# Altium PCB S52最小系统.PcbDoc (part 7 of 9)
Units mm, origin at the board's own origin, x right, y up, seen from the top; angles counter-clockwise.
Board outline 152.4 x 101.6 mm, 2 copper layers (Top Layer, Bottom Layer); 29 components, 53 nets, 176 pads, 2 vias.
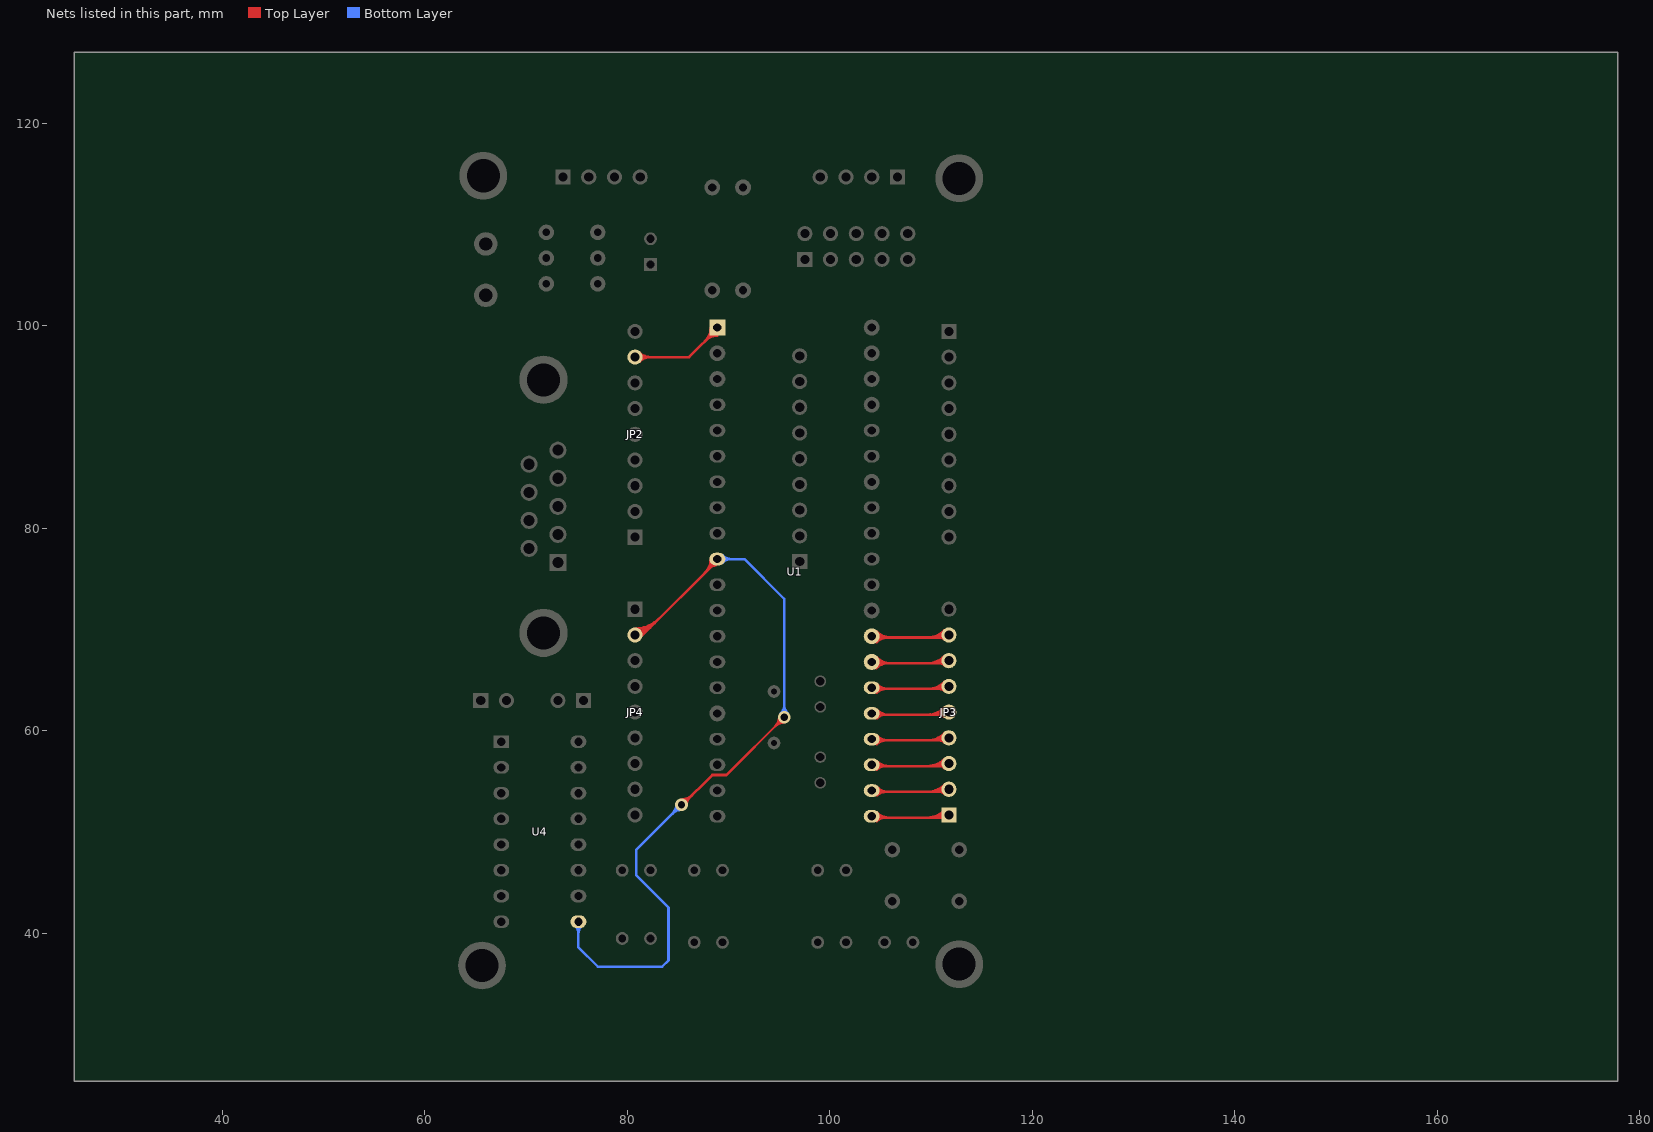
[diagram p7: the nets of this part, all layers, seen from the top]

## Via types
v1: diameter 1.27, hole 0.711, Top Layer to Bottom Layer, 2 vias

## Nets (pads, with @x,y where several pads share a name; then routed paths per layer and width w, separated by ;. In a path a pad name is that pad's centre, name@x,y a point inside that pad or via, vN(x,y) a via of type N, cw(c..) or ccw(c..) an arc to the next point about the centre after c; other vN are vias at no path point) (continued)
NetJP2_8: JP2.8 U1.1 | length 85.2
  Top Layer w0.254: JP2.8@80.772,96.901 86.103,96.901 U1.1@88.896,99.694 ; JP2.8@81.033,96.64 cw(c81.663,96.01) 81.663,96.901 ; JP2.8@81.033,96.64 cw(c81.663,96.01) 81.663,96.901 ; JP2.8@81.033,96.64 cw(c81.663,96.01) 81.663,96.901 ; JP2.8@81.033,96.64 cw(c81.663,96.01) 81.663,96.901 ; JP2.8@81.033,96.64 cw(c81.663,96.01) 81.663,96.901 ; JP2.8@81.033,96.64 cw(c81.663,96.01) 81.663,96.901 ; JP2.8@81.033,96.64 cw(c81.663,96.01) 81.663,96.901 ; JP2.8@81.033,96.64 cw(c81.663,96.01) 81.663,96.901 ; JP2.8@81.033,96.64 cw(c81.663,96.01) 81.663,96.901 ; JP2.8@81.033,96.64 cw(c81.663,96.01) 81.663,96.901 ; JP2.8@81.033,97.162 ccw(c81.663,97.792) 81.663,96.901 ; JP2.8@81.033,97.162 ccw(c81.663,97.792) 81.663,96.901 ; JP2.8@81.033,97.162 ccw(c81.663,97.792) 81.663,96.901 ; JP2.8@81.033,97.162 ccw(c81.663,97.792) 81.663,96.901 ; JP2.8@81.033,97.162 ccw(c81.663,97.792) 81.663,96.901 ; JP2.8@81.033,97.162 ccw(c81.663,97.792) 81.663,96.901 ; JP2.8@81.033,97.162 ccw(c81.663,97.792) 81.663,96.901 ; JP2.8@81.033,97.162 ccw(c81.663,97.792) 81.663,96.901 ; JP2.8@81.033,97.162 ccw(c81.663,97.792) 81.663,96.901 ; JP2.8@81.033,97.162 ccw(c81.663,97.792) 81.663,96.901 ; JP2.8@81.213,96.46 cw(c82.276,95.397) 82.276,96.901 ; JP2.8@81.213,96.46 cw(c82.276,95.397) 82.276,96.901 ; JP2.8@81.213,96.46 cw(c82.276,95.397) 82.276,96.901 ; JP2.8@81.213,96.46 cw(c82.276,95.397) 82.276,96.901 ; JP2.8@81.213,96.46 cw(c82.276,95.397) 82.276,96.901 ; JP2.8@81.213,96.46 cw(c82.276,95.397) 82.276,96.901 ; JP2.8@81.213,96.46 cw(c82.276,95.397) 82.276,96.901 ; JP2.8@81.213,96.46 cw(c82.276,95.397) 82.276,96.901 ; JP2.8@81.213,96.46 cw(c82.276,95.397) 82.276,96.901 ; JP2.8@81.213,96.46 cw(c82.276,95.397) 82.276,96.901 ; JP2.8@81.213,97.342 ccw(c82.276,98.405) 82.276,96.901 ; JP2.8@81.213,97.342 ccw(c82.276,98.405) 82.276,96.901 ; JP2.8@81.213,97.342 ccw(c82.276,98.405) 82.276,96.901 ; JP2.8@81.213,97.342 ccw(c82.276,98.405) 82.276,96.901 ; JP2.8@81.213,97.342 ccw(c82.276,98.405) 82.276,96.901 ; JP2.8@81.213,97.342 ccw(c82.276,98.405) 82.276,96.901 ; JP2.8@81.213,97.342 ccw(c82.276,98.405) 82.276,96.901 ; JP2.8@81.213,97.342 ccw(c82.276,98.405) 82.276,96.901 ; JP2.8@81.213,97.342 ccw(c82.276,98.405) 82.276,96.901 ; JP2.8@81.213,97.342 ccw(c82.276,98.405) 82.276,96.901 ; 87.679,98.477 ccw(c86.335,99.821) U1.1@88.236,99.821 ; 87.679,98.477 ccw(c86.335,99.821) U1.1@88.236,99.821 ; 87.679,98.477 ccw(c86.335,99.821) U1.1@88.236,99.821 ; 87.679,98.477 ccw(c86.335,99.821) U1.1@88.236,99.821 ; 87.769,98.567 cw(c88.896,97.439) U1.1@88.896,99.034 ; 87.769,98.567 ccw(c86.641,99.694) U1.1@88.236,99.694 ; 87.769,98.567 ccw(c86.641,99.694) U1.1@88.236,99.694 ; 87.769,98.567 cw(c88.896,97.439) U1.1@88.896,99.034 ; 87.769,98.567 ccw(c86.641,99.694) U1.1@88.236,99.694 ; 87.769,98.567 cw(c88.896,97.439) U1.1@88.896,99.034 ; 87.769,98.567 ccw(c86.641,99.694) U1.1@88.236,99.694 ; 87.769,98.567 cw(c88.896,97.439) U1.1@88.896,99.034 ; 87.769,98.567 ccw(c86.641,99.694) U1.1@88.236,99.694 ; 87.769,98.567 cw(c88.896,97.439) U1.1@88.896,99.034 ; 87.769,98.567 ccw(c86.641,99.694) U1.1@88.236,99.694 ; 87.769,98.567 cw(c88.896,97.439) U1.1@88.896,99.034 ; 87.986,98.783 cw(c88.896,97.873) U1.1@88.896,99.161 ; 87.986,98.783 cw(c88.896,97.873) U1.1@88.896,99.161 ; 87.986,98.783 cw(c88.896,97.873) U1.1@88.896,99.161 ; 87.986,98.783 cw(c88.896,97.873) U1.1@88.896,99.161 ; 88.113,98.91 ccw(c87.202,99.821) U1.1@88.49,99.821 ; 88.113,98.91 ccw(c87.202,99.821) U1.1@88.49,99.821 ; 88.113,98.91 ccw(c87.202,99.821) U1.1@88.49,99.821 ; 88.113,98.91 ccw(c87.202,99.821) U1.1@88.49,99.821 ; 88.202,99 cw(c88.896,98.306) U1.1@88.896,99.288 ; 88.202,99 ccw(c87.509,99.694) U1.1@88.49,99.694 ; 88.202,99 ccw(c87.509,99.694) U1.1@88.49,99.694 ; 88.202,99 cw(c88.896,98.306) U1.1@88.896,99.288 ; 88.202,99 ccw(c87.509,99.694) U1.1@88.49,99.694 ; 88.202,99 cw(c88.896,98.306) U1.1@88.896,99.288 ; 88.202,99 ccw(c87.509,99.694) U1.1@88.49,99.694 ; 88.202,99 cw(c88.896,98.306) U1.1@88.896,99.288 ; 88.202,99 ccw(c87.509,99.694) U1.1@88.49,99.694 ; 88.202,99 cw(c88.896,98.306) U1.1@88.896,99.288 ; 88.202,99 ccw(c87.509,99.694) U1.1@88.49,99.694 ; 88.202,99 cw(c88.896,98.306) U1.1@88.896,99.288
NetJP3_1: JP3.1 U1.21 | length 76.3
  Top Layer w0.254: U1.21@104.136,51.434 111.505,51.434 JP3.1@111.76,51.689 ; U1.21@104.471,51.734 ccw(c105.194,52.457) 105.194,51.434 ; U1.21@104.471,51.734 ccw(c105.194,52.457) 105.194,51.434 ; U1.21@104.471,51.734 ccw(c105.194,52.457) 105.194,51.434 ; U1.21@104.471,51.734 ccw(c105.194,52.457) 105.194,51.434 ; U1.21@104.651,51.082 cw(c105.501,50.232) 105.501,51.434 ; U1.21@104.651,51.082 cw(c105.501,50.232) 105.501,51.434 ; U1.21@104.651,51.082 cw(c105.501,50.232) 105.501,51.434 ; U1.21@104.651,51.082 cw(c105.501,50.232) 105.501,51.434 ; U1.21@104.651,51.082 cw(c105.501,50.232) 105.501,51.434 ; U1.21@104.651,51.082 cw(c105.501,50.232) 105.501,51.434 ; U1.21@104.651,51.209 cw(c105.194,50.665) 105.194,51.434 ; U1.21@104.651,51.209 cw(c105.194,50.665) 105.194,51.434 ; U1.21@104.651,51.209 cw(c105.194,50.665) 105.194,51.434 ; U1.21@104.651,51.209 cw(c105.194,50.665) 105.194,51.434 ; U1.21@104.651,51.786 ccw(c105.501,52.636) 105.501,51.434 ; U1.21@104.651,51.786 ccw(c105.501,52.636) 105.501,51.434 ; U1.21@104.651,51.786 ccw(c105.501,52.636) 105.501,51.434 ; U1.21@104.651,51.786 ccw(c105.501,52.636) 105.501,51.434 ; U1.21@104.651,51.786 ccw(c105.501,52.636) 105.501,51.434 ; U1.21@104.651,51.786 ccw(c105.501,52.636) 105.501,51.434 ; U1.21@104.651,51.913 ccw(c105.807,53.07) 105.807,51.434 ; U1.21@104.651,51.913 ccw(c105.807,53.07) 105.807,51.434 ; U1.21@104.651,51.913 ccw(c105.807,53.07) 105.807,51.434 ; U1.21@104.651,51.913 ccw(c105.807,53.07) 105.807,51.434 ; 109.64,51.434 ccw(c109.64,53.809) JP3.1@111.319,52.13 ; 109.64,51.434 ccw(c109.64,53.809) JP3.1@111.319,52.13 ; 109.64,51.434 ccw(c109.64,53.809) JP3.1@111.319,52.13 ; 109.64,51.434 ccw(c109.64,53.809) JP3.1@111.319,52.13 ; 109.64,51.434 ccw(c109.64,53.809) JP3.1@111.319,52.13 ; 109.64,51.434 ccw(c109.64,53.809) JP3.1@111.319,52.13 ; 109.64,51.434 ccw(c109.64,53.809) JP3.1@111.319,52.13 ; 109.64,51.434 ccw(c109.64,53.809) JP3.1@111.319,52.13 ; 109.64,51.434 ccw(c109.64,53.809) JP3.1@111.319,52.13 ; 109.64,51.434 ccw(c109.64,53.809) JP3.1@111.319,52.13 ; 110.254,51.434 ccw(c110.254,53.195) JP3.1@111.499,51.95 ; 110.254,51.434 ccw(c110.254,53.195) JP3.1@111.499,51.95 ; 110.254,51.434 ccw(c110.254,53.195) JP3.1@111.499,51.95 ; 110.254,51.434 ccw(c110.254,53.195) JP3.1@111.499,51.95 ; 110.254,51.434 ccw(c110.254,53.195) JP3.1@111.499,51.95 ; 110.254,51.434 ccw(c110.254,53.195) JP3.1@111.499,51.95 ; 110.254,51.434 ccw(c110.254,53.195) JP3.1@111.499,51.95 ; 110.254,51.434 ccw(c110.254,53.195) JP3.1@111.499,51.95 ; 110.254,51.434 ccw(c110.254,53.195) JP3.1@111.499,51.95 ; 110.254,51.434 ccw(c110.254,53.195) JP3.1@111.499,51.95 ; 110.867,51.434 ccw(c110.867,52.582) JP3.1@111.679,51.77 ; 110.867,51.434 ccw(c110.867,52.582) JP3.1@111.679,51.77 ; 110.867,51.434 ccw(c110.867,52.582) JP3.1@111.679,51.77 ; 110.867,51.434 ccw(c110.867,52.582) JP3.1@111.679,51.77 ; 110.867,51.434 ccw(c110.867,52.582) JP3.1@111.679,51.77 ; 110.867,51.434 ccw(c110.867,52.582) JP3.1@111.679,51.77 ; 110.867,51.434 ccw(c110.867,52.582) JP3.1@111.679,51.77 ; 110.867,51.434 ccw(c110.867,52.582) JP3.1@111.679,51.77 ; 110.867,51.434 ccw(c110.867,52.582) JP3.1@111.679,51.77 ; 110.867,51.434 ccw(c110.867,52.582) JP3.1@111.679,51.77 ; 110.872,51.434 cw(c110.872,50.801) JP3.1@111.319,51.248 ; 110.872,51.434 cw(c110.872,50.801) JP3.1@111.319,51.248 ; 110.872,51.434 cw(c110.872,50.801) JP3.1@111.319,51.248 ; 110.872,51.434 cw(c110.872,50.801) JP3.1@111.319,51.248 ; 110.872,51.434 cw(c110.872,50.801) JP3.1@111.319,51.248 ; 110.872,51.434 cw(c110.872,50.801) JP3.1@111.319,51.248 ; 110.872,51.434 cw(c110.872,50.801) JP3.1@111.319,51.248 ; 110.872,51.434 cw(c110.872,50.801) JP3.1@111.319,51.248 ; 110.872,51.434 cw(c110.872,50.801) JP3.1@111.319,51.248 ; 110.872,51.434 cw(c110.872,50.801) JP3.1@111.319,51.248
NetJP3_2: JP3.2 U1.22 | length 76.3
  Top Layer w0.254: U1.22@104.136,53.974 111.505,53.974 JP3.2@111.76,54.229 ; U1.22@104.471,54.274 ccw(c105.194,54.997) 105.194,53.974 ; U1.22@104.471,54.274 ccw(c105.194,54.997) 105.194,53.974 ; U1.22@104.471,54.274 ccw(c105.194,54.997) 105.194,53.974 ; U1.22@104.471,54.274 ccw(c105.194,54.997) 105.194,53.974 ; U1.22@104.651,53.622 cw(c105.501,52.772) 105.501,53.974 ; U1.22@104.651,53.622 cw(c105.501,52.772) 105.501,53.974 ; U1.22@104.651,53.622 cw(c105.501,52.772) 105.501,53.974 ; U1.22@104.651,53.622 cw(c105.501,52.772) 105.501,53.974 ; U1.22@104.651,53.622 cw(c105.501,52.772) 105.501,53.974 ; U1.22@104.651,53.622 cw(c105.501,52.772) 105.501,53.974 ; U1.22@104.651,53.749 cw(c105.194,53.205) 105.194,53.974 ; U1.22@104.651,53.749 cw(c105.194,53.205) 105.194,53.974 ; U1.22@104.651,53.749 cw(c105.194,53.205) 105.194,53.974 ; U1.22@104.651,53.749 cw(c105.194,53.205) 105.194,53.974 ; U1.22@104.651,54.326 ccw(c105.501,55.176) 105.501,53.974 ; U1.22@104.651,54.326 ccw(c105.501,55.176) 105.501,53.974 ; U1.22@104.651,54.326 ccw(c105.501,55.176) 105.501,53.974 ; U1.22@104.651,54.326 ccw(c105.501,55.176) 105.501,53.974 ; U1.22@104.651,54.326 ccw(c105.501,55.176) 105.501,53.974 ; U1.22@104.651,54.326 ccw(c105.501,55.176) 105.501,53.974 ; U1.22@104.651,54.453 ccw(c105.807,55.61) 105.807,53.974 ; U1.22@104.651,54.453 ccw(c105.807,55.61) 105.807,53.974 ; U1.22@104.651,54.453 ccw(c105.807,55.61) 105.807,53.974 ; U1.22@104.651,54.453 ccw(c105.807,55.61) 105.807,53.974 ; 109.64,53.974 ccw(c109.64,56.349) JP3.2@111.319,54.67 ; 109.64,53.974 ccw(c109.64,56.349) JP3.2@111.319,54.67 ; 109.64,53.974 ccw(c109.64,56.349) JP3.2@111.319,54.67 ; 109.64,53.974 ccw(c109.64,56.349) JP3.2@111.319,54.67 ; 109.64,53.974 ccw(c109.64,56.349) JP3.2@111.319,54.67 ; 109.64,53.974 ccw(c109.64,56.349) JP3.2@111.319,54.67 ; 109.64,53.974 ccw(c109.64,56.349) JP3.2@111.319,54.67 ; 109.64,53.974 ccw(c109.64,56.349) JP3.2@111.319,54.67 ; 109.64,53.974 ccw(c109.64,56.349) JP3.2@111.319,54.67 ; 109.64,53.974 ccw(c109.64,56.349) JP3.2@111.319,54.67 ; 110.254,53.974 ccw(c110.254,55.735) JP3.2@111.499,54.49 ; 110.254,53.974 ccw(c110.254,55.735) JP3.2@111.499,54.49 ; 110.254,53.974 ccw(c110.254,55.735) JP3.2@111.499,54.49 ; 110.254,53.974 ccw(c110.254,55.735) JP3.2@111.499,54.49 ; 110.254,53.974 ccw(c110.254,55.735) JP3.2@111.499,54.49 ; 110.254,53.974 ccw(c110.254,55.735) JP3.2@111.499,54.49 ; 110.254,53.974 ccw(c110.254,55.735) JP3.2@111.499,54.49 ; 110.254,53.974 ccw(c110.254,55.735) JP3.2@111.499,54.49 ; 110.254,53.974 ccw(c110.254,55.735) JP3.2@111.499,54.49 ; 110.254,53.974 ccw(c110.254,55.735) JP3.2@111.499,54.49 ; 110.867,53.974 ccw(c110.867,55.122) JP3.2@111.679,54.31 ; 110.867,53.974 ccw(c110.867,55.122) JP3.2@111.679,54.31 ; 110.867,53.974 ccw(c110.867,55.122) JP3.2@111.679,54.31 ; 110.867,53.974 ccw(c110.867,55.122) JP3.2@111.679,54.31 ; 110.867,53.974 ccw(c110.867,55.122) JP3.2@111.679,54.31 ; 110.867,53.974 ccw(c110.867,55.122) JP3.2@111.679,54.31 ; 110.867,53.974 ccw(c110.867,55.122) JP3.2@111.679,54.31 ; 110.867,53.974 ccw(c110.867,55.122) JP3.2@111.679,54.31 ; 110.867,53.974 ccw(c110.867,55.122) JP3.2@111.679,54.31 ; 110.867,53.974 ccw(c110.867,55.122) JP3.2@111.679,54.31 ; 110.872,53.974 cw(c110.872,53.341) JP3.2@111.319,53.788 ; 110.872,53.974 cw(c110.872,53.341) JP3.2@111.319,53.788 ; 110.872,53.974 cw(c110.872,53.341) JP3.2@111.319,53.788 ; 110.872,53.974 cw(c110.872,53.341) JP3.2@111.319,53.788 ; 110.872,53.974 cw(c110.872,53.341) JP3.2@111.319,53.788 ; 110.872,53.974 cw(c110.872,53.341) JP3.2@111.319,53.788 ; 110.872,53.974 cw(c110.872,53.341) JP3.2@111.319,53.788 ; 110.872,53.974 cw(c110.872,53.341) JP3.2@111.319,53.788 ; 110.872,53.974 cw(c110.872,53.341) JP3.2@111.319,53.788 ; 110.872,53.974 cw(c110.872,53.341) JP3.2@111.319,53.788
NetJP3_3: JP3.3 U1.23 | length 76.3
  Top Layer w0.254: U1.23@104.136,56.514 111.505,56.514 JP3.3@111.76,56.769 ; U1.23@104.471,56.814 ccw(c105.194,57.537) 105.194,56.514 ; U1.23@104.471,56.814 ccw(c105.194,57.537) 105.194,56.514 ; U1.23@104.471,56.814 ccw(c105.194,57.537) 105.194,56.514 ; U1.23@104.471,56.814 ccw(c105.194,57.537) 105.194,56.514 ; U1.23@104.651,56.162 cw(c105.501,55.312) 105.501,56.514 ; U1.23@104.651,56.162 cw(c105.501,55.312) 105.501,56.514 ; U1.23@104.651,56.162 cw(c105.501,55.312) 105.501,56.514 ; U1.23@104.651,56.162 cw(c105.501,55.312) 105.501,56.514 ; U1.23@104.651,56.162 cw(c105.501,55.312) 105.501,56.514 ; U1.23@104.651,56.162 cw(c105.501,55.312) 105.501,56.514 ; U1.23@104.651,56.289 cw(c105.194,55.745) 105.194,56.514 ; U1.23@104.651,56.289 cw(c105.194,55.745) 105.194,56.514 ; U1.23@104.651,56.289 cw(c105.194,55.745) 105.194,56.514 ; U1.23@104.651,56.289 cw(c105.194,55.745) 105.194,56.514 ; U1.23@104.651,56.866 ccw(c105.501,57.716) 105.501,56.514 ; U1.23@104.651,56.866 ccw(c105.501,57.716) 105.501,56.514 ; U1.23@104.651,56.866 ccw(c105.501,57.716) 105.501,56.514 ; U1.23@104.651,56.866 ccw(c105.501,57.716) 105.501,56.514 ; U1.23@104.651,56.866 ccw(c105.501,57.716) 105.501,56.514 ; U1.23@104.651,56.866 ccw(c105.501,57.716) 105.501,56.514 ; U1.23@104.651,56.993 ccw(c105.807,58.15) 105.807,56.514 ; U1.23@104.651,56.993 ccw(c105.807,58.15) 105.807,56.514 ; U1.23@104.651,56.993 ccw(c105.807,58.15) 105.807,56.514 ; U1.23@104.651,56.993 ccw(c105.807,58.15) 105.807,56.514 ; 109.64,56.514 ccw(c109.64,58.889) JP3.3@111.319,57.21 ; 109.64,56.514 ccw(c109.64,58.889) JP3.3@111.319,57.21 ; 109.64,56.514 ccw(c109.64,58.889) JP3.3@111.319,57.21 ; 109.64,56.514 ccw(c109.64,58.889) JP3.3@111.319,57.21 ; 109.64,56.514 ccw(c109.64,58.889) JP3.3@111.319,57.21 ; 109.64,56.514 ccw(c109.64,58.889) JP3.3@111.319,57.21 ; 109.64,56.514 ccw(c109.64,58.889) JP3.3@111.319,57.21 ; 109.64,56.514 ccw(c109.64,58.889) JP3.3@111.319,57.21 ; 109.64,56.514 ccw(c109.64,58.889) JP3.3@111.319,57.21 ; 109.64,56.514 ccw(c109.64,58.889) JP3.3@111.319,57.21 ; 110.254,56.514 ccw(c110.254,58.275) JP3.3@111.499,57.03 ; 110.254,56.514 ccw(c110.254,58.275) JP3.3@111.499,57.03 ; 110.254,56.514 ccw(c110.254,58.275) JP3.3@111.499,57.03 ; 110.254,56.514 ccw(c110.254,58.275) JP3.3@111.499,57.03 ; 110.254,56.514 ccw(c110.254,58.275) JP3.3@111.499,57.03 ; 110.254,56.514 ccw(c110.254,58.275) JP3.3@111.499,57.03 ; 110.254,56.514 ccw(c110.254,58.275) JP3.3@111.499,57.03 ; 110.254,56.514 ccw(c110.254,58.275) JP3.3@111.499,57.03 ; 110.254,56.514 ccw(c110.254,58.275) JP3.3@111.499,57.03 ; 110.254,56.514 ccw(c110.254,58.275) JP3.3@111.499,57.03 ; 110.867,56.514 ccw(c110.867,57.662) JP3.3@111.679,56.85 ; 110.867,56.514 ccw(c110.867,57.662) JP3.3@111.679,56.85 ; 110.867,56.514 ccw(c110.867,57.662) JP3.3@111.679,56.85 ; 110.867,56.514 ccw(c110.867,57.662) JP3.3@111.679,56.85 ; 110.867,56.514 ccw(c110.867,57.662) JP3.3@111.679,56.85 ; 110.867,56.514 ccw(c110.867,57.662) JP3.3@111.679,56.85 ; 110.867,56.514 ccw(c110.867,57.662) JP3.3@111.679,56.85 ; 110.867,56.514 ccw(c110.867,57.662) JP3.3@111.679,56.85 ; 110.867,56.514 ccw(c110.867,57.662) JP3.3@111.679,56.85 ; 110.867,56.514 ccw(c110.867,57.662) JP3.3@111.679,56.85 ; 110.872,56.514 cw(c110.872,55.881) JP3.3@111.319,56.328 ; 110.872,56.514 cw(c110.872,55.881) JP3.3@111.319,56.328 ; 110.872,56.514 cw(c110.872,55.881) JP3.3@111.319,56.328 ; 110.872,56.514 cw(c110.872,55.881) JP3.3@111.319,56.328 ; 110.872,56.514 cw(c110.872,55.881) JP3.3@111.319,56.328 ; 110.872,56.514 cw(c110.872,55.881) JP3.3@111.319,56.328 ; 110.872,56.514 cw(c110.872,55.881) JP3.3@111.319,56.328 ; 110.872,56.514 cw(c110.872,55.881) JP3.3@111.319,56.328 ; 110.872,56.514 cw(c110.872,55.881) JP3.3@111.319,56.328 ; 110.872,56.514 cw(c110.872,55.881) JP3.3@111.319,56.328
NetJP3_4: JP3.4 U1.24 | length 76.3
  Top Layer w0.254: U1.24@104.136,59.054 111.505,59.054 JP3.4@111.76,59.309 ; U1.24@104.471,59.354 ccw(c105.194,60.077) 105.194,59.054 ; U1.24@104.471,59.354 ccw(c105.194,60.077) 105.194,59.054 ; U1.24@104.471,59.354 ccw(c105.194,60.077) 105.194,59.054 ; U1.24@104.471,59.354 ccw(c105.194,60.077) 105.194,59.054 ; U1.24@104.651,58.702 cw(c105.501,57.852) 105.501,59.054 ; U1.24@104.651,58.702 cw(c105.501,57.852) 105.501,59.054 ; U1.24@104.651,58.702 cw(c105.501,57.852) 105.501,59.054 ; U1.24@104.651,58.702 cw(c105.501,57.852) 105.501,59.054 ; U1.24@104.651,58.702 cw(c105.501,57.852) 105.501,59.054 ; U1.24@104.651,58.702 cw(c105.501,57.852) 105.501,59.054 ; U1.24@104.651,58.829 cw(c105.194,58.285) 105.194,59.054 ; U1.24@104.651,58.829 cw(c105.194,58.285) 105.194,59.054 ; U1.24@104.651,58.829 cw(c105.194,58.285) 105.194,59.054 ; U1.24@104.651,58.829 cw(c105.194,58.285) 105.194,59.054 ; U1.24@104.651,59.406 ccw(c105.501,60.256) 105.501,59.054 ; U1.24@104.651,59.406 ccw(c105.501,60.256) 105.501,59.054 ; U1.24@104.651,59.406 ccw(c105.501,60.256) 105.501,59.054 ; U1.24@104.651,59.406 ccw(c105.501,60.256) 105.501,59.054 ; U1.24@104.651,59.406 ccw(c105.501,60.256) 105.501,59.054 ; U1.24@104.651,59.406 ccw(c105.501,60.256) 105.501,59.054 ; U1.24@104.651,59.533 ccw(c105.807,60.69) 105.807,59.054 ; U1.24@104.651,59.533 ccw(c105.807,60.69) 105.807,59.054 ; U1.24@104.651,59.533 ccw(c105.807,60.69) 105.807,59.054 ; U1.24@104.651,59.533 ccw(c105.807,60.69) 105.807,59.054 ; 109.64,59.054 ccw(c109.64,61.429) JP3.4@111.319,59.75 ; 109.64,59.054 ccw(c109.64,61.429) JP3.4@111.319,59.75 ; 109.64,59.054 ccw(c109.64,61.429) JP3.4@111.319,59.75 ; 109.64,59.054 ccw(c109.64,61.429) JP3.4@111.319,59.75 ; 109.64,59.054 ccw(c109.64,61.429) JP3.4@111.319,59.75 ; 109.64,59.054 ccw(c109.64,61.429) JP3.4@111.319,59.75 ; 109.64,59.054 ccw(c109.64,61.429) JP3.4@111.319,59.75 ; 109.64,59.054 ccw(c109.64,61.429) JP3.4@111.319,59.75 ; 109.64,59.054 ccw(c109.64,61.429) JP3.4@111.319,59.75 ; 109.64,59.054 ccw(c109.64,61.429) JP3.4@111.319,59.75 ; 110.254,59.054 ccw(c110.254,60.815) JP3.4@111.499,59.57 ; 110.254,59.054 ccw(c110.254,60.815) JP3.4@111.499,59.57 ; 110.254,59.054 ccw(c110.254,60.815) JP3.4@111.499,59.57 ; 110.254,59.054 ccw(c110.254,60.815) JP3.4@111.499,59.57 ; 110.254,59.054 ccw(c110.254,60.815) JP3.4@111.499,59.57 ; 110.254,59.054 ccw(c110.254,60.815) JP3.4@111.499,59.57 ; 110.254,59.054 ccw(c110.254,60.815) JP3.4@111.499,59.57 ; 110.254,59.054 ccw(c110.254,60.815) JP3.4@111.499,59.57 ; 110.254,59.054 ccw(c110.254,60.815) JP3.4@111.499,59.57 ; 110.254,59.054 ccw(c110.254,60.815) JP3.4@111.499,59.57 ; 110.867,59.054 ccw(c110.867,60.202) JP3.4@111.679,59.39 ; 110.867,59.054 ccw(c110.867,60.202) JP3.4@111.679,59.39 ; 110.867,59.054 ccw(c110.867,60.202) JP3.4@111.679,59.39 ; 110.867,59.054 ccw(c110.867,60.202) JP3.4@111.679,59.39 ; 110.867,59.054 ccw(c110.867,60.202) JP3.4@111.679,59.39 ; 110.867,59.054 ccw(c110.867,60.202) JP3.4@111.679,59.39 ; 110.867,59.054 ccw(c110.867,60.202) JP3.4@111.679,59.39 ; 110.867,59.054 ccw(c110.867,60.202) JP3.4@111.679,59.39 ; 110.867,59.054 ccw(c110.867,60.202) JP3.4@111.679,59.39 ; 110.867,59.054 ccw(c110.867,60.202) JP3.4@111.679,59.39 ; 110.872,59.054 cw(c110.872,58.421) JP3.4@111.319,58.868 ; 110.872,59.054 cw(c110.872,58.421) JP3.4@111.319,58.868 ; 110.872,59.054 cw(c110.872,58.421) JP3.4@111.319,58.868 ; 110.872,59.054 cw(c110.872,58.421) JP3.4@111.319,58.868 ; 110.872,59.054 cw(c110.872,58.421) JP3.4@111.319,58.868 ; 110.872,59.054 cw(c110.872,58.421) JP3.4@111.319,58.868 ; 110.872,59.054 cw(c110.872,58.421) JP3.4@111.319,58.868 ; 110.872,59.054 cw(c110.872,58.421) JP3.4@111.319,58.868 ; 110.872,59.054 cw(c110.872,58.421) JP3.4@111.319,58.868 ; 110.872,59.054 cw(c110.872,58.421) JP3.4@111.319,58.868
NetJP3_5: JP3.5 U1.25 | length 76.3
  Top Layer w0.254: U1.25@104.136,61.594 111.505,61.594 JP3.5@111.76,61.849 ; U1.25@104.471,61.894 ccw(c105.194,62.617) 105.194,61.594 ; U1.25@104.471,61.894 ccw(c105.194,62.617) 105.194,61.594 ; U1.25@104.471,61.894 ccw(c105.194,62.617) 105.194,61.594 ; U1.25@104.471,61.894 ccw(c105.194,62.617) 105.194,61.594 ; U1.25@104.651,61.242 cw(c105.501,60.392) 105.501,61.594 ; U1.25@104.651,61.242 cw(c105.501,60.392) 105.501,61.594 ; U1.25@104.651,61.242 cw(c105.501,60.392) 105.501,61.594 ; U1.25@104.651,61.242 cw(c105.501,60.392) 105.501,61.594 ; U1.25@104.651,61.242 cw(c105.501,60.392) 105.501,61.594 ; U1.25@104.651,61.242 cw(c105.501,60.392) 105.501,61.594 ; U1.25@104.651,61.369 cw(c105.194,60.825) 105.194,61.594 ; U1.25@104.651,61.369 cw(c105.194,60.825) 105.194,61.594 ; U1.25@104.651,61.369 cw(c105.194,60.825) 105.194,61.594 ; U1.25@104.651,61.369 cw(c105.194,60.825) 105.194,61.594 ; U1.25@104.651,61.946 ccw(c105.501,62.796) 105.501,61.594 ; U1.25@104.651,61.946 ccw(c105.501,62.796) 105.501,61.594 ; U1.25@104.651,61.946 ccw(c105.501,62.796) 105.501,61.594 ; U1.25@104.651,61.946 ccw(c105.501,62.796) 105.501,61.594 ; U1.25@104.651,61.946 ccw(c105.501,62.796) 105.501,61.594 ; U1.25@104.651,61.946 ccw(c105.501,62.796) 105.501,61.594 ; U1.25@104.651,62.073 ccw(c105.807,63.23) 105.807,61.594 ; U1.25@104.651,62.073 ccw(c105.807,63.23) 105.807,61.594 ; U1.25@104.651,62.073 ccw(c105.807,63.23) 105.807,61.594 ; U1.25@104.651,62.073 ccw(c105.807,63.23) 105.807,61.594 ; 109.64,61.594 ccw(c109.64,63.969) JP3.5@111.319,62.29 ; 109.64,61.594 ccw(c109.64,63.969) JP3.5@111.319,62.29 ; 109.64,61.594 ccw(c109.64,63.969) JP3.5@111.319,62.29 ; 109.64,61.594 ccw(c109.64,63.969) JP3.5@111.319,62.29 ; 109.64,61.594 ccw(c109.64,63.969) JP3.5@111.319,62.29 ; 109.64,61.594 ccw(c109.64,63.969) JP3.5@111.319,62.29 ; 109.64,61.594 ccw(c109.64,63.969) JP3.5@111.319,62.29 ; 109.64,61.594 ccw(c109.64,63.969) JP3.5@111.319,62.29 ; 109.64,61.594 ccw(c109.64,63.969) JP3.5@111.319,62.29 ; 109.64,61.594 ccw(c109.64,63.969) JP3.5@111.319,62.29 ; 110.254,61.594 ccw(c110.254,63.355) JP3.5@111.499,62.11 ; 110.254,61.594 ccw(c110.254,63.355) JP3.5@111.499,62.11 ; 110.254,61.594 ccw(c110.254,63.355) JP3.5@111.499,62.11 ; 110.254,61.594 ccw(c110.254,63.355) JP3.5@111.499,62.11 ; 110.254,61.594 ccw(c110.254,63.355) JP3.5@111.499,62.11 ; 110.254,61.594 ccw(c110.254,63.355) JP3.5@111.499,62.11 ; 110.254,61.594 ccw(c110.254,63.355) JP3.5@111.499,62.11 ; 110.254,61.594 ccw(c110.254,63.355) JP3.5@111.499,62.11 ; 110.254,61.594 ccw(c110.254,63.355) JP3.5@111.499,62.11 ; 110.254,61.594 ccw(c110.254,63.355) JP3.5@111.499,62.11 ; 110.867,61.594 ccw(c110.867,62.742) JP3.5@111.679,61.93 ; 110.867,61.594 ccw(c110.867,62.742) JP3.5@111.679,61.93 ; 110.867,61.594 ccw(c110.867,62.742) JP3.5@111.679,61.93 ; 110.867,61.594 ccw(c110.867,62.742) JP3.5@111.679,61.93 ; 110.867,61.594 ccw(c110.867,62.742) JP3.5@111.679,61.93 ; 110.867,61.594 ccw(c110.867,62.742) JP3.5@111.679,61.93 ; 110.867,61.594 ccw(c110.867,62.742) JP3.5@111.679,61.93 ; 110.867,61.594 ccw(c110.867,62.742) JP3.5@111.679,61.93 ; 110.867,61.594 ccw(c110.867,62.742) JP3.5@111.679,61.93 ; 110.867,61.594 ccw(c110.867,62.742) JP3.5@111.679,61.93 ; 110.872,61.594 cw(c110.872,60.961) JP3.5@111.319,61.408 ; 110.872,61.594 cw(c110.872,60.961) JP3.5@111.319,61.408 ; 110.872,61.594 cw(c110.872,60.961) JP3.5@111.319,61.408 ; 110.872,61.594 cw(c110.872,60.961) JP3.5@111.319,61.408 ; 110.872,61.594 cw(c110.872,60.961) JP3.5@111.319,61.408 ; 110.872,61.594 cw(c110.872,60.961) JP3.5@111.319,61.408 ; 110.872,61.594 cw(c110.872,60.961) JP3.5@111.319,61.408 ; 110.872,61.594 cw(c110.872,60.961) JP3.5@111.319,61.408 ; 110.872,61.594 cw(c110.872,60.961) JP3.5@111.319,61.408 ; 110.872,61.594 cw(c110.872,60.961) JP3.5@111.319,61.408
NetJP3_6: JP3.6 U1.26 | length 76.3
  Top Layer w0.254: U1.26@104.136,64.134 111.505,64.134 JP3.6@111.76,64.389 ; U1.26@104.471,64.434 ccw(c105.194,65.157) 105.194,64.134 ; U1.26@104.471,64.434 ccw(c105.194,65.157) 105.194,64.134 ; U1.26@104.471,64.434 ccw(c105.194,65.157) 105.194,64.134 ; U1.26@104.471,64.434 ccw(c105.194,65.157) 105.194,64.134 ; U1.26@104.651,63.782 cw(c105.501,62.932) 105.501,64.134 ; U1.26@104.651,63.782 cw(c105.501,62.932) 105.501,64.134 ; U1.26@104.651,63.782 cw(c105.501,62.932) 105.501,64.134 ; U1.26@104.651,63.782 cw(c105.501,62.932) 105.501,64.134 ; U1.26@104.651,63.782 cw(c105.501,62.932) 105.501,64.134 ; U1.26@104.651,63.782 cw(c105.501,62.932) 105.501,64.134 ; U1.26@104.651,63.909 cw(c105.194,63.365) 105.194,64.134 ; U1.26@104.651,63.909 cw(c105.194,63.365) 105.194,64.134 ; U1.26@104.651,63.909 cw(c105.194,63.365) 105.194,64.134 ; U1.26@104.651,63.909 cw(c105.194,63.365) 105.194,64.134 ; U1.26@104.651,64.486 ccw(c105.501,65.336) 105.501,64.134 ; U1.26@104.651,64.486 ccw(c105.501,65.336) 105.501,64.134 ; U1.26@104.651,64.486 ccw(c105.501,65.336) 105.501,64.134 ; U1.26@104.651,64.486 ccw(c105.501,65.336) 105.501,64.134 ; U1.26@104.651,64.486 ccw(c105.501,65.336) 105.501,64.134 ; U1.26@104.651,64.486 ccw(c105.501,65.336) 105.501,64.134 ; U1.26@104.651,64.613 ccw(c105.807,65.77) 105.807,64.134 ; U1.26@104.651,64.613 ccw(c105.807,65.77) 105.807,64.134 ; U1.26@104.651,64.613 ccw(c105.807,65.77) 105.807,64.134 ; U1.26@104.651,64.613 ccw(c105.807,65.77) 105.807,64.134 ; 109.64,64.134 ccw(c109.64,66.509) JP3.6@111.319,64.83 ; 109.64,64.134 ccw(c109.64,66.509) JP3.6@111.319,64.83 ; 109.64,64.134 ccw(c109.64,66.509) JP3.6@111.319,64.83 ; 109.64,64.134 ccw(c109.64,66.509) JP3.6@111.319,64.83 ; 109.64,64.134 ccw(c109.64,66.509) JP3.6@111.319,64.83 ; 109.64,64.134 ccw(c109.64,66.509) JP3.6@111.319,64.83 ; 109.64,64.134 ccw(c109.64,66.509) JP3.6@111.319,64.83 ; 109.64,64.134 ccw(c109.64,66.509) JP3.6@111.319,64.83 ; 109.64,64.134 ccw(c109.64,66.509) JP3.6@111.319,64.83 ; 109.64,64.134 ccw(c109.64,66.509) JP3.6@111.319,64.83 ; 110.254,64.134 ccw(c110.254,65.895) JP3.6@111.499,64.65 ; 110.254,64.134 ccw(c110.254,65.895) JP3.6@111.499,64.65 ; 110.254,64.134 ccw(c110.254,65.895) JP3.6@111.499,64.65 ; 110.254,64.134 ccw(c110.254,65.895) JP3.6@111.499,64.65 ; 110.254,64.134 ccw(c110.254,65.895) JP3.6@111.499,64.65 ; 110.254,64.134 ccw(c110.254,65.895) JP3.6@111.499,64.65 ; 110.254,64.134 ccw(c110.254,65.895) JP3.6@111.499,64.65 ; 110.254,64.134 ccw(c110.254,65.895) JP3.6@111.499,64.65 ; 110.254,64.134 ccw(c110.254,65.895) JP3.6@111.499,64.65 ; 110.254,64.134 ccw(c110.254,65.895) JP3.6@111.499,64.65 ; 110.867,64.134 ccw(c110.867,65.282) JP3.6@111.679,64.47 ; 110.867,64.134 ccw(c110.867,65.282) JP3.6@111.679,64.47 ; 110.867,64.134 ccw(c110.867,65.282) JP3.6@111.679,64.47 ; 110.867,64.134 ccw(c110.867,65.282) JP3.6@111.679,64.47 ; 110.867,64.134 ccw(c110.867,65.282) JP3.6@111.679,64.47 ; 110.867,64.134 ccw(c110.867,65.282) JP3.6@111.679,64.47 ; 110.867,64.134 ccw(c110.867,65.282) JP3.6@111.679,64.47 ; 110.867,64.134 ccw(c110.867,65.282) JP3.6@111.679,64.47 ; 110.867,64.134 ccw(c110.867,65.282) JP3.6@111.679,64.47 ; 110.867,64.134 ccw(c110.867,65.282) JP3.6@111.679,64.47 ; 110.872,64.134 cw(c110.872,63.501) JP3.6@111.319,63.948 ; 110.872,64.134 cw(c110.872,63.501) JP3.6@111.319,63.948 ; 110.872,64.134 cw(c110.872,63.501) JP3.6@111.319,63.948 ; 110.872,64.134 cw(c110.872,63.501) JP3.6@111.319,63.948 ; 110.872,64.134 cw(c110.872,63.501) JP3.6@111.319,63.948 ; 110.872,64.134 cw(c110.872,63.501) JP3.6@111.319,63.948 ; 110.872,64.134 cw(c110.872,63.501) JP3.6@111.319,63.948 ; 110.872,64.134 cw(c110.872,63.501) JP3.6@111.319,63.948 ; 110.872,64.134 cw(c110.872,63.501) JP3.6@111.319,63.948 ; 110.872,64.134 cw(c110.872,63.501) JP3.6@111.319,63.948
NetJP3_7: JP3.7 U1.27 | length 92.9
  Top Layer w0.254: U1.27@104.136,66.674 111.505,66.674 JP3.7@111.76,66.929 ; U1.27@104.424,66.387 cw(c105.117,65.693) 105.117,66.674 ; U1.27@104.424,66.387 cw(c105.117,65.693) 105.117,66.674 ; U1.27@104.424,66.387 cw(c105.117,65.693) 105.117,66.674 ; U1.27@104.424,66.387 cw(c105.117,65.693) 105.117,66.674 ; U1.27@104.424,66.387 cw(c105.117,65.693) 105.117,66.674 ; U1.27@104.424,66.387 cw(c105.117,65.693) 105.117,66.674 ; U1.27@104.424,66.961 ccw(c105.117,67.655) 105.117,66.674 ; U1.27@104.424,66.961 ccw(c105.117,67.655) 105.117,66.674 ; U1.27@104.424,66.961 ccw(c105.117,67.655) 105.117,66.674 ; U1.27@104.424,66.961 ccw(c105.117,67.655) 105.117,66.674 ; U1.27@104.424,66.961 ccw(c105.117,67.655) 105.117,66.674 ; U1.27@104.424,66.961 ccw(c105.117,67.655) 105.117,66.674 ; U1.27@104.424,67.088 ccw(c105.424,68.089) 105.424,66.674 ; U1.27@104.424,67.088 ccw(c105.424,68.089) 105.424,66.674 ; U1.27@104.424,67.088 ccw(c105.424,68.089) 105.424,66.674 ; U1.27@104.424,67.088 ccw(c105.424,68.089) 105.424,66.674 ; U1.27@104.603,66.207 cw(c105.731,65.08) 105.731,66.674 ; U1.27@104.603,66.207 cw(c105.731,65.08) 105.731,66.674 ; U1.27@104.603,66.207 cw(c105.731,65.08) 105.731,66.674 ; U1.27@104.603,66.207 cw(c105.731,65.08) 105.731,66.674 ; U1.27@104.603,66.207 cw(c105.731,65.08) 105.731,66.674 ; U1.27@104.603,66.207 cw(c105.731,65.08) 105.731,66.674 ; U1.27@104.603,66.334 cw(c105.424,65.513) 105.424,66.674 ; U1.27@104.603,66.334 cw(c105.424,65.513) 105.424,66.674 ; U1.27@104.603,66.334 cw(c105.424,65.513) 105.424,66.674 ; U1.27@104.603,66.334 cw(c105.424,65.513) 105.424,66.674 ; U1.27@104.603,67.141 ccw(c105.731,68.268) 105.731,66.674 ; U1.27@104.603,67.141 ccw(c105.731,68.268) 105.731,66.674 ; U1.27@104.603,67.141 ccw(c105.731,68.268) 105.731,66.674 ; U1.27@104.603,67.141 ccw(c105.731,68.268) 105.731,66.674 ; U1.27@104.603,67.141 ccw(c105.731,68.268) 105.731,66.674 ; U1.27@104.603,67.141 ccw(c105.731,68.268) 105.731,66.674 ; U1.27@104.603,67.268 ccw(c106.037,68.702) 106.037,66.674 ; U1.27@104.603,67.268 ccw(c106.037,68.702) 106.037,66.674 ; U1.27@104.603,67.268 ccw(c106.037,68.702) 106.037,66.674 ; U1.27@104.603,67.268 ccw(c106.037,68.702) 106.037,66.674 ; 109.64,66.674 ccw(c109.64,69.049) JP3.7@111.319,67.37 ; 109.64,66.674 ccw(c109.64,69.049) JP3.7@111.319,67.37 ; 109.64,66.674 ccw(c109.64,69.049) JP3.7@111.319,67.37 ; 109.64,66.674 ccw(c109.64,69.049) JP3.7@111.319,67.37 ; 109.64,66.674 ccw(c109.64,69.049) JP3.7@111.319,67.37 ; 109.64,66.674 ccw(c109.64,69.049) JP3.7@111.319,67.37 ; 109.64,66.674 ccw(c109.64,69.049) JP3.7@111.319,67.37 ; 109.64,66.674 ccw(c109.64,69.049) JP3.7@111.319,67.37 ; 109.64,66.674 ccw(c109.64,69.049) JP3.7@111.319,67.37 ; 109.64,66.674 ccw(c109.64,69.049) JP3.7@111.319,67.37 ; 110.254,66.674 ccw(c110.254,68.435) JP3.7@111.499,67.19 ; 110.254,66.674 ccw(c110.254,68.435) JP3.7@111.499,67.19 ; 110.254,66.674 ccw(c110.254,68.435) JP3.7@111.499,67.19 ; 110.254,66.674 ccw(c110.254,68.435) JP3.7@111.499,67.19 ; 110.254,66.674 ccw(c110.254,68.435) JP3.7@111.499,67.19 ; 110.254,66.674 ccw(c110.254,68.435) JP3.7@111.499,67.19 ; 110.254,66.674 ccw(c110.254,68.435) JP3.7@111.499,67.19 ; 110.254,66.674 ccw(c110.254,68.435) JP3.7@111.499,67.19 ; 110.254,66.674 ccw(c110.254,68.435) JP3.7@111.499,67.19 ; 110.254,66.674 ccw(c110.254,68.435) JP3.7@111.499,67.19 ; 110.867,66.674 ccw(c110.867,67.822) JP3.7@111.679,67.01 ; 110.867,66.674 ccw(c110.867,67.822) JP3.7@111.679,67.01 ; 110.867,66.674 ccw(c110.867,67.822) JP3.7@111.679,67.01 ; 110.867,66.674 ccw(c110.867,67.822) JP3.7@111.679,67.01 ; 110.867,66.674 ccw(c110.867,67.822) JP3.7@111.679,67.01 ; 110.867,66.674 ccw(c110.867,67.822) JP3.7@111.679,67.01 ; 110.867,66.674 ccw(c110.867,67.822) JP3.7@111.679,67.01 ; 110.867,66.674 ccw(c110.867,67.822) JP3.7@111.679,67.01 ; 110.867,66.674 ccw(c110.867,67.822) JP3.7@111.679,67.01 ; 110.867,66.674 ccw(c110.867,67.822) JP3.7@111.679,67.01 ; 110.872,66.674 cw(c110.872,66.041) JP3.7@111.319,66.488 ; 110.872,66.674 cw(c110.872,66.041) JP3.7@111.319,66.488 ; 110.872,66.674 cw(c110.872,66.041) JP3.7@111.319,66.488 ; 110.872,66.674 cw(c110.872,66.041) JP3.7@111.319,66.488 ; 110.872,66.674 cw(c110.872,66.041) JP3.7@111.319,66.488 ; 110.872,66.674 cw(c110.872,66.041) JP3.7@111.319,66.488 ; 110.872,66.674 cw(c110.872,66.041) JP3.7@111.319,66.488 ; 110.872,66.674 cw(c110.872,66.041) JP3.7@111.319,66.488 ; 110.872,66.674 cw(c110.872,66.041) JP3.7@111.319,66.488 ; 110.872,66.674 cw(c110.872,66.041) JP3.7@111.319,66.488
NetJP3_8: JP3.8 U1.28 | length 92.9
  Top Layer w0.254: U1.28@104.136,69.214 111.505,69.214 JP3.8@111.76,69.469 ; U1.28@104.424,68.927 cw(c105.117,68.233) 105.117,69.214 ; U1.28@104.424,68.927 cw(c105.117,68.233) 105.117,69.214 ; U1.28@104.424,68.927 cw(c105.117,68.233) 105.117,69.214 ; U1.28@104.424,68.927 cw(c105.117,68.233) 105.117,69.214 ; U1.28@104.424,68.927 cw(c105.117,68.233) 105.117,69.214 ; U1.28@104.424,68.927 cw(c105.117,68.233) 105.117,69.214 ; U1.28@104.424,69.501 ccw(c105.117,70.195) 105.117,69.214 ; U1.28@104.424,69.501 ccw(c105.117,70.195) 105.117,69.214 ; U1.28@104.424,69.501 ccw(c105.117,70.195) 105.117,69.214 ; U1.28@104.424,69.501 ccw(c105.117,70.195) 105.117,69.214 ; U1.28@104.424,69.501 ccw(c105.117,70.195) 105.117,69.214 ; U1.28@104.424,69.501 ccw(c105.117,70.195) 105.117,69.214 ; U1.28@104.424,69.628 ccw(c105.424,70.629) 105.424,69.214 ; U1.28@104.424,69.628 ccw(c105.424,70.629) 105.424,69.214 ; U1.28@104.424,69.628 ccw(c105.424,70.629) 105.424,69.214 ; U1.28@104.424,69.628 ccw(c105.424,70.629) 105.424,69.214 ; U1.28@104.603,68.747 cw(c105.731,67.62) 105.731,69.214 ; U1.28@104.603,68.747 cw(c105.731,67.62) 105.731,69.214 ; U1.28@104.603,68.747 cw(c105.731,67.62) 105.731,69.214 ; U1.28@104.603,68.747 cw(c105.731,67.62) 105.731,69.214 ; U1.28@104.603,68.747 cw(c105.731,67.62) 105.731,69.214 ; U1.28@104.603,68.747 cw(c105.731,67.62) 105.731,69.214 ; U1.28@104.603,68.874 cw(c105.424,68.053) 105.424,69.214 ; U1.28@104.603,68.874 cw(c105.424,68.053) 105.424,69.214 ; U1.28@104.603,68.874 cw(c105.424,68.053) 105.424,69.214 ; U1.28@104.603,68.874 cw(c105.424,68.053) 105.424,69.214 ; U1.28@104.603,69.681 ccw(c105.731,70.808) 105.731,69.214 ; U1.28@104.603,69.681 ccw(c105.731,70.808) 105.731,69.214 ; U1.28@104.603,69.681 ccw(c105.731,70.808) 105.731,69.214 ; U1.28@104.603,69.681 ccw(c105.731,70.808) 105.731,69.214 ; U1.28@104.603,69.681 ccw(c105.731,70.808) 105.731,69.214 ; U1.28@104.603,69.681 ccw(c105.731,70.808) 105.731,69.214 ; U1.28@104.603,69.808 ccw(c106.037,71.242) 106.037,69.214 ; U1.28@104.603,69.808 ccw(c106.037,71.242) 106.037,69.214 ; U1.28@104.603,69.808 ccw(c106.037,71.242) 106.037,69.214 ; U1.28@104.603,69.808 ccw(c106.037,71.242) 106.037,69.214 ; 109.64,69.214 ccw(c109.64,71.589) JP3.8@111.319,69.91 ; 109.64,69.214 ccw(c109.64,71.589) JP3.8@111.319,69.91 ; 109.64,69.214 ccw(c109.64,71.589) JP3.8@111.319,69.91 ; 109.64,69.214 ccw(c109.64,71.589) JP3.8@111.319,69.91 ; 109.64,69.214 ccw(c109.64,71.589) JP3.8@111.319,69.91 ; 109.64,69.214 ccw(c109.64,71.589) JP3.8@111.319,69.91 ; 109.64,69.214 ccw(c109.64,71.589) JP3.8@111.319,69.91 ; 109.64,69.214 ccw(c109.64,71.589) JP3.8@111.319,69.91 ; 109.64,69.214 ccw(c109.64,71.589) JP3.8@111.319,69.91 ; 109.64,69.214 ccw(c109.64,71.589) JP3.8@111.319,69.91 ; 110.254,69.214 ccw(c110.254,70.975) JP3.8@111.499,69.73 ; 110.254,69.214 ccw(c110.254,70.975) JP3.8@111.499,69.73 ; 110.254,69.214 ccw(c110.254,70.975) JP3.8@111.499,69.73 ; 110.254,69.214 ccw(c110.254,70.975) JP3.8@111.499,69.73 ; 110.254,69.214 ccw(c110.254,70.975) JP3.8@111.499,69.73 ; 110.254,69.214 ccw(c110.254,70.975) JP3.8@111.499,69.73 ; 110.254,69.214 ccw(c110.254,70.975) JP3.8@111.499,69.73 ; 110.254,69.214 ccw(c110.254,70.975) JP3.8@111.499,69.73 ; 110.254,69.214 ccw(c110.254,70.975) JP3.8@111.499,69.73 ; 110.254,69.214 ccw(c110.254,70.975) JP3.8@111.499,69.73 ; 110.867,69.214 ccw(c110.867,70.362) JP3.8@111.679,69.55 ; 110.867,69.214 ccw(c110.867,70.362) JP3.8@111.679,69.55 ; 110.867,69.214 ccw(c110.867,70.362) JP3.8@111.679,69.55 ; 110.867,69.214 ccw(c110.867,70.362) JP3.8@111.679,69.55 ; 110.867,69.214 ccw(c110.867,70.362) JP3.8@111.679,69.55 ; 110.867,69.214 ccw(c110.867,70.362) JP3.8@111.679,69.55 ; 110.867,69.214 ccw(c110.867,70.362) JP3.8@111.679,69.55 ; 110.867,69.214 ccw(c110.867,70.362) JP3.8@111.679,69.55 ; 110.867,69.214 ccw(c110.867,70.362) JP3.8@111.679,69.55 ; 110.867,69.214 ccw(c110.867,70.362) JP3.8@111.679,69.55 ; 110.872,69.214 cw(c110.872,68.581) JP3.8@111.319,69.028 ; 110.872,69.214 cw(c110.872,68.581) JP3.8@111.319,69.028 ; 110.872,69.214 cw(c110.872,68.581) JP3.8@111.319,69.028 ; 110.872,69.214 cw(c110.872,68.581) JP3.8@111.319,69.028 ; 110.872,69.214 cw(c110.872,68.581) JP3.8@111.319,69.028 ; 110.872,69.214 cw(c110.872,68.581) JP3.8@111.319,69.028 ; 110.872,69.214 cw(c110.872,68.581) JP3.8@111.319,69.028 ; 110.872,69.214 cw(c110.872,68.581) JP3.8@111.319,69.028 ; 110.872,69.214 cw(c110.872,68.581) JP3.8@111.319,69.028 ; 110.872,69.214 cw(c110.872,68.581) JP3.8@111.319,69.028
NetJP4_2: JP4.2 U1.10 U4.9 | length 196.2
  Top Layer w0.254: JP4.2@80.772,69.469 81.531,69.469 ; v1@85.344,52.959 ccw(c85.344,53.879) 85.994,53.228 ; v1@85.852,52.705 cw(c86.772,52.705) 86.121,53.355 ; 86.428,53.662 cw(c85.344,54.746) 85.344,53.213 v1(85.344,52.705) 85.471,52.705 88.401,55.635 89.798,55.635 v1(95.504,61.341) ; U1.10@88.896,76.834 81.531,69.469 ; v1@94.996,61.341 cw(c93.77,61.341) 94.637,60.474 cw(c95.504,59.607) v1@95.504,60.833 ; JP4.2@80.772,69.33 ccw(c80.772,70.827) 81.831,69.769 ; JP4.2@80.772,69.33 ccw(c80.772,70.827) 81.831,69.769 ; JP4.2@80.772,69.33 ccw(c80.772,70.827) 81.831,69.769 ; JP4.2@80.772,69.33 ccw(c80.772,70.827) 81.831,69.769 ; JP4.2@80.772,69.33 ccw(c80.772,70.827) 81.831,69.769 ; JP4.2@80.772,69.33 ccw(c80.772,70.827) 81.831,69.769 ; JP4.2@80.772,69.33 ccw(c80.772,70.827) 81.831,69.769 ; JP4.2@80.772,69.33 ccw(c80.772,70.827) 81.831,69.769 ; JP4.2@80.772,69.33 ccw(c80.772,70.827) 81.831,69.769 ; JP4.2@80.772,69.33 ccw(c80.772,70.827) 81.831,69.769 ; JP4.2@80.772,69.584 ccw(c80.772,71.694) 82.264,70.202 ; JP4.2@80.772,69.584 ccw(c80.772,71.694) 82.264,70.202 ; JP4.2@80.772,69.584 ccw(c80.772,71.694) 82.264,70.202 ; JP4.2@80.772,69.584 ccw(c80.772,71.694) 82.264,70.202 ; JP4.2@80.772,69.584 ccw(c80.772,71.694) 82.264,70.202 ; JP4.2@80.772,69.584 ccw(c80.772,71.694) 82.264,70.202 ; JP4.2@80.772,69.584 ccw(c80.772,71.694) 82.264,70.202 ; JP4.2@80.772,69.584 ccw(c80.772,71.694) 82.264,70.202 ; JP4.2@80.772,69.584 ccw(c80.772,71.694) 82.264,70.202 ; JP4.2@80.772,69.584 ccw(c80.772,71.694) 82.264,70.202 ; JP4.2@80.772,69.838 ccw(c80.772,72.562) 82.698,70.636 ; JP4.2@80.772,69.838 ccw(c80.772,72.562) 82.698,70.636 ; JP4.2@80.772,69.838 ccw(c80.772,72.562) 82.698,70.636 ; JP4.2@80.772,69.838 ccw(c80.772,72.562) 82.698,70.636 ; JP4.2@80.772,69.838 ccw(c80.772,72.562) 82.698,70.636 ; JP4.2@80.772,69.838 ccw(c80.772,72.562) 82.698,70.636 ; JP4.2@80.772,69.838 ccw(c80.772,72.562) 82.698,70.636 ; JP4.2@80.772,69.838 ccw(c80.772,72.562) 82.698,70.636 ; JP4.2@80.772,69.838 ccw(c80.772,72.562) 82.698,70.636 ; JP4.2@80.772,69.838 ccw(c80.772,72.562) 82.698,70.636 ; JP4.2@80.772,70.092 ccw(c80.772,73.429) 83.132,71.069 ; JP4.2@80.772,70.092 ccw(c80.772,73.429) 83.132,71.069 ; JP4.2@80.772,70.092 ccw(c80.772,73.429) 83.132,71.069 ; JP4.2@80.772,70.092 ccw(c80.772,73.429) 83.132,71.069 ; JP4.2@80.772,70.092 ccw(c80.772,73.429) 83.132,71.069 ; JP4.2@80.772,70.092 ccw(c80.772,73.429) 83.132,71.069 ; JP4.2@80.772,70.092 ccw(c80.772,73.429) 83.132,71.069 ; JP4.2@80.772,70.092 ccw(c80.772,73.429) 83.132,71.069 ; JP4.2@80.772,70.092 ccw(c80.772,73.429) 83.132,71.069 ; JP4.2@80.772,70.092 ccw(c80.772,73.429) 83.132,71.069 ; JP4.2@81.383,69.347 cw(c81.531,69.318) 81.531,69.469 ; JP4.2@81.383,69.347 cw(c81.531,69.318) 81.531,69.469 ; JP4.2@81.383,69.347 cw(c81.531,69.318) 81.531,69.469 ; JP4.2@81.383,69.347 cw(c81.531,69.318) 81.531,69.469 ; JP4.2@81.383,69.347 cw(c81.531,69.318) 81.531,69.469 ; JP4.2@81.383,69.347 cw(c81.531,69.318) 81.531,69.469 ; JP4.2@81.383,69.347 cw(c81.531,69.318) 81.531,69.469 ; JP4.2@81.383,69.347 cw(c81.531,69.318) 81.531,69.469 ; JP4.2@81.383,69.347 cw(c81.531,69.318) 81.531,69.469 ; JP4.2@81.383,69.347 cw(c81.531,69.318) 81.531,69.469 ; JP4.2@81.383,69.591 ccw(c81.531,69.62) 81.531,69.469 ; JP4.2@81.383,69.591 ccw(c81.531,69.62) 81.531,69.469 ; JP4.2@81.383,69.591 ccw(c81.531,69.62) 81.531,69.469 ; JP4.2@81.383,69.591 ccw(c81.531,69.62) 81.531,69.469 ; JP4.2@81.383,69.591 ccw(c81.531,69.62) 81.531,69.469 ; JP4.2@81.383,69.591 ccw(c81.531,69.62) 81.531,69.469 ; JP4.2@81.383,69.591 ccw(c81.531,69.62) 81.531,69.469 ; JP4.2@81.383,69.591 ccw(c81.531,69.62) 81.531,69.469 ; JP4.2@81.383,69.591 ccw(c81.531,69.62) 81.531,69.469 ; JP4.2@81.383,69.591 ccw(c81.531,69.62) 81.531,69.469 ; 87.679,75.617 ccw(c86.335,76.961) U1.10@88.236,76.961 ; 87.679,75.617 ccw(c86.335,76.961) U1.10@88.236,76.961 ; 87.679,75.617 ccw(c86.335,76.961) U1.10@88.236,76.961 ; 87.679,75.617 ccw(c86.335,76.961) U1.10@88.236,76.961 ; 87.769,75.707 ccw(c86.641,76.834) U1.10@88.236,76.834 ; 87.769,75.707 ccw(c86.641,76.834) U1.10@88.236,76.834 ; 87.769,75.707 ccw(c86.641,76.834) U1.10@88.236,76.834 ; 87.769,75.707 ccw(c86.641,76.834) U1.10@88.236,76.834 ; 87.769,75.707 ccw(c86.641,76.834) U1.10@88.236,76.834 ; 87.769,75.707 ccw(c86.641,76.834) U1.10@88.236,76.834 ; 88.113,76.05 ccw(c87.202,76.961) U1.10@88.49,76.961 ; 88.113,76.05 ccw(c87.202,76.961) U1.10@88.49,76.961 ; 88.113,76.05 ccw(c87.202,76.961) U1.10@88.49,76.961 ; 88.113,76.05 ccw(c87.202,76.961) U1.10@88.49,76.961 ; 88.161,76.099 cw(c88.734,75.526) U1.10@88.734,76.336 ; 88.161,76.099 cw(c88.734,75.526) U1.10@88.734,76.336 ; 88.161,76.099 cw(c88.734,75.526) U1.10@88.734,76.336 ; 88.161,76.099 cw(c88.734,75.526) U1.10@88.734,76.336 ; 88.161,76.099 cw(c88.734,75.526) U1.10@88.734,76.336 ; 88.161,76.099 cw(c88.734,75.526) U1.10@88.734,76.336 ; 88.202,76.14 ccw(c87.509,76.834) U1.10@88.49,76.834 ; 88.202,76.14 ccw(c87.509,76.834) U1.10@88.49,76.834 ; 88.202,76.14 ccw(c87.509,76.834) U1.10@88.49,76.834 ; 88.202,76.14 ccw(c87.509,76.834) U1.10@88.49,76.834 ; 88.202,76.14 ccw(c87.509,76.834) U1.10@88.49,76.834 ; 88.202,76.14 ccw(c87.509,76.834) U1.10@88.49,76.834 ; 88.378,76.315 cw(c88.734,75.959) U1.10@88.734,76.463 ; 88.378,76.315 cw(c88.734,75.959) U1.10@88.734,76.463 ; 88.378,76.315 cw(c88.734,75.959) U1.10@88.734,76.463 ; 88.378,76.315 cw(c88.734,75.959) U1.10@88.734,76.463
  Bottom Layer w0.254: U4.9@74.828,40.795 cw(c73.978,39.945) 75.18,39.945 cw(c76.382,39.945) U4.9@75.532,40.795 ; U4.9@75.18,41.147 75.18,38.612 77.089,36.703 83.439,36.703 84.074,37.338 84.074,42.545 80.899,45.72 80.899,48.26 v1(85.344,52.705) ; v1@84.836,52.705 cw(c83.61,52.705) 84.477,51.838 cw(c85.344,50.971) v1@85.344,52.197 ; U1.10@88.896,76.961 91.568,76.961 95.504,73.025 v1(95.504,61.341) ; U1.10@89.411,76.609 cw(c90.261,75.759) 90.261,76.961 cw(c90.261,78.163) U1.10@89.411,77.313 ; v1@95.145,61.7 ccw(c94.278,62.567) 95.504,62.567 ccw(c96.73,62.567) v1@95.863,61.7